# Altium PCB CAP-BULK.PcbDoc
Units mm, origin at the board's own origin, x right, y up, seen from the top; angles counter-clockwise.
Board outline 200 x 80 mm, 2 copper layers (Top Layer, Bottom Layer); 33 components, 19 nets, 78 pads, 172 vias.
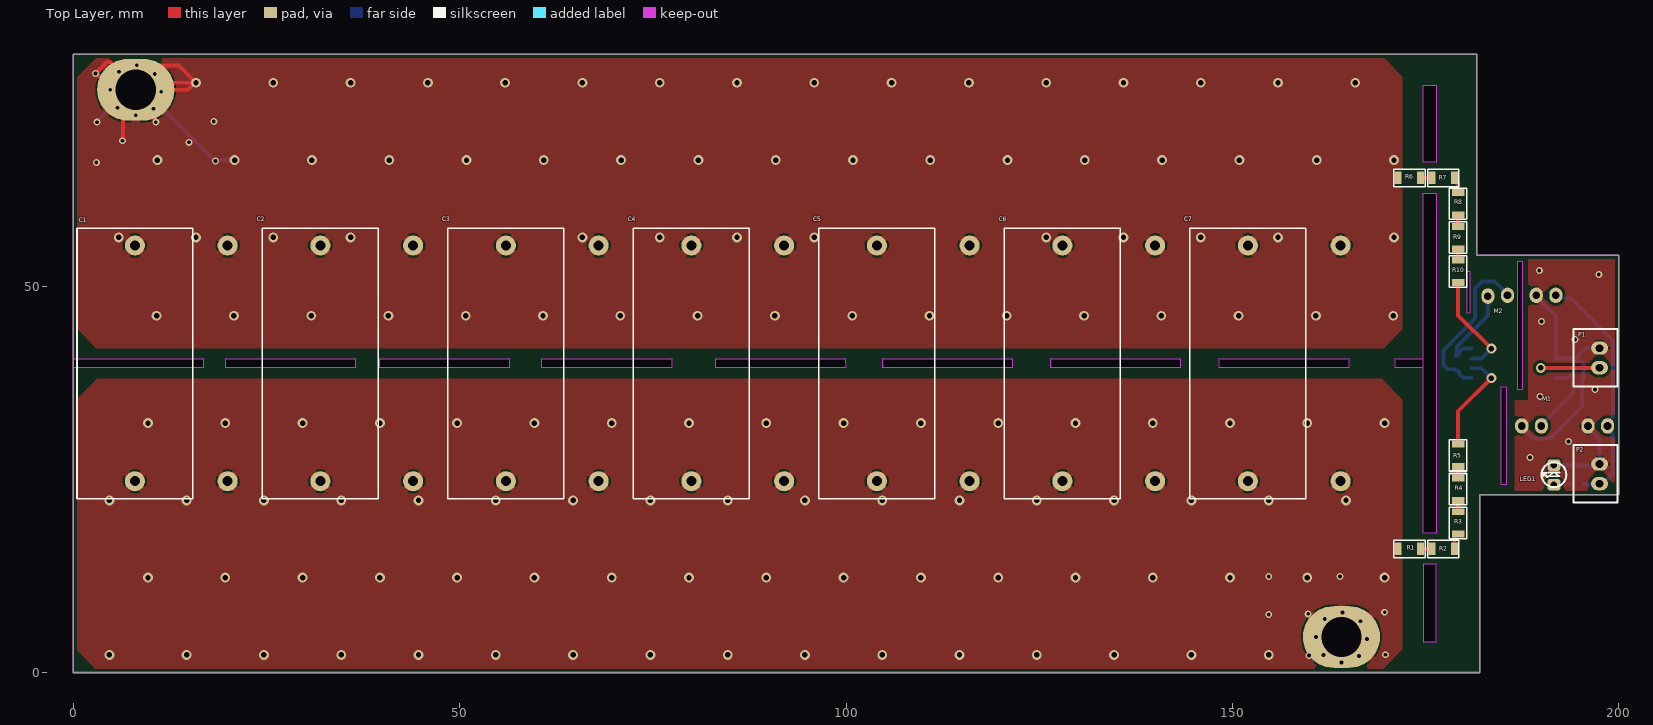
[diagram p0: Top Layer view]
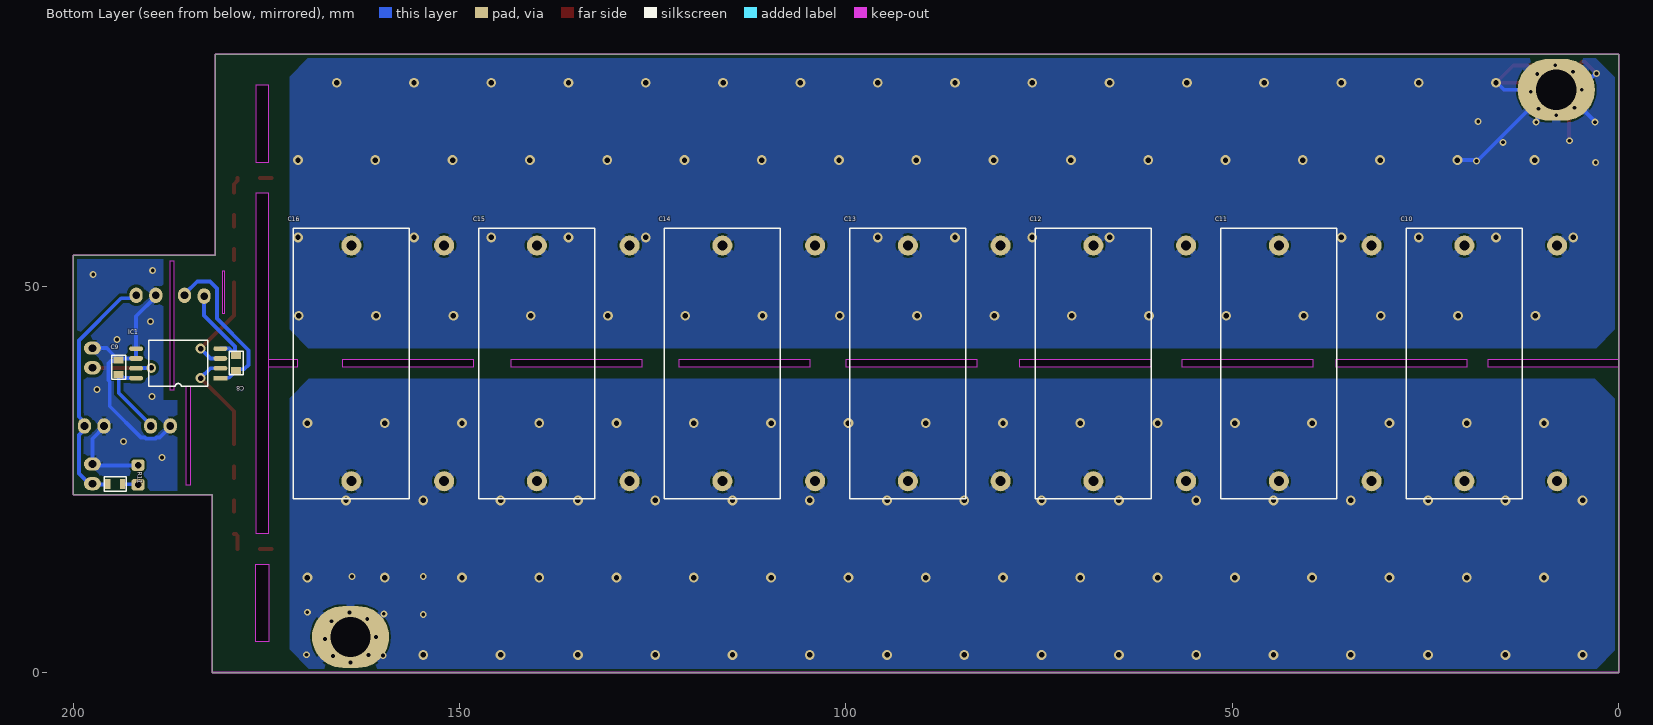
[diagram p1: Bottom Layer view, seen from below]
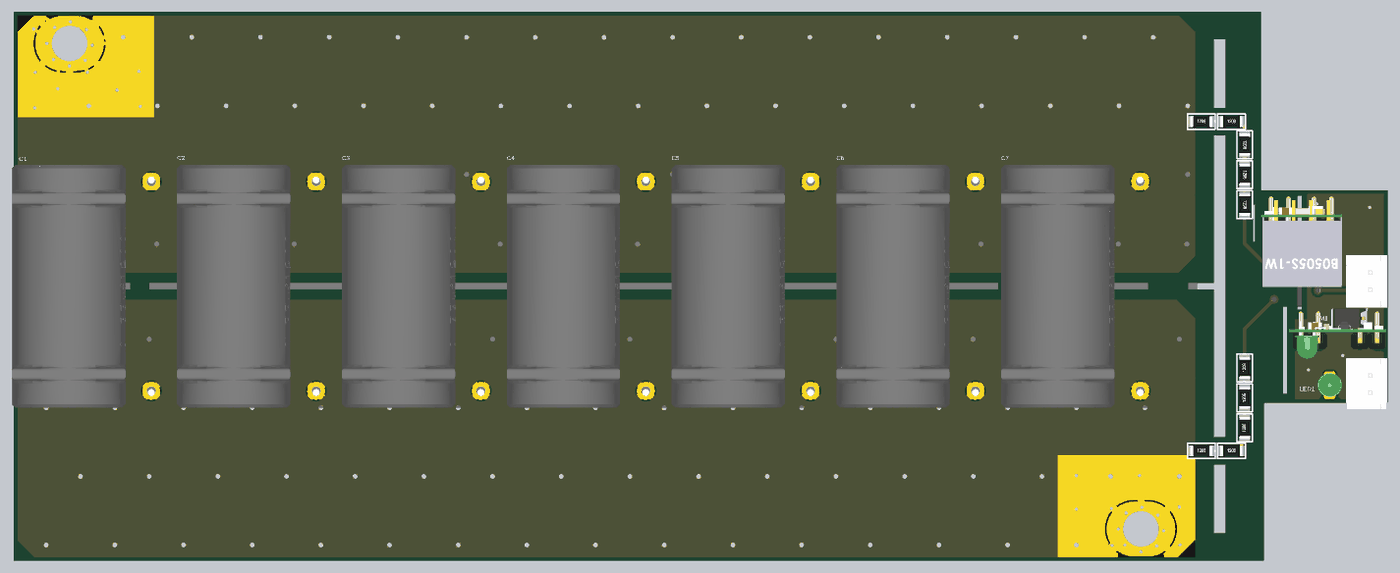
[diagram p2: 3D render of the assembled board from above, using the file's embedded part models]
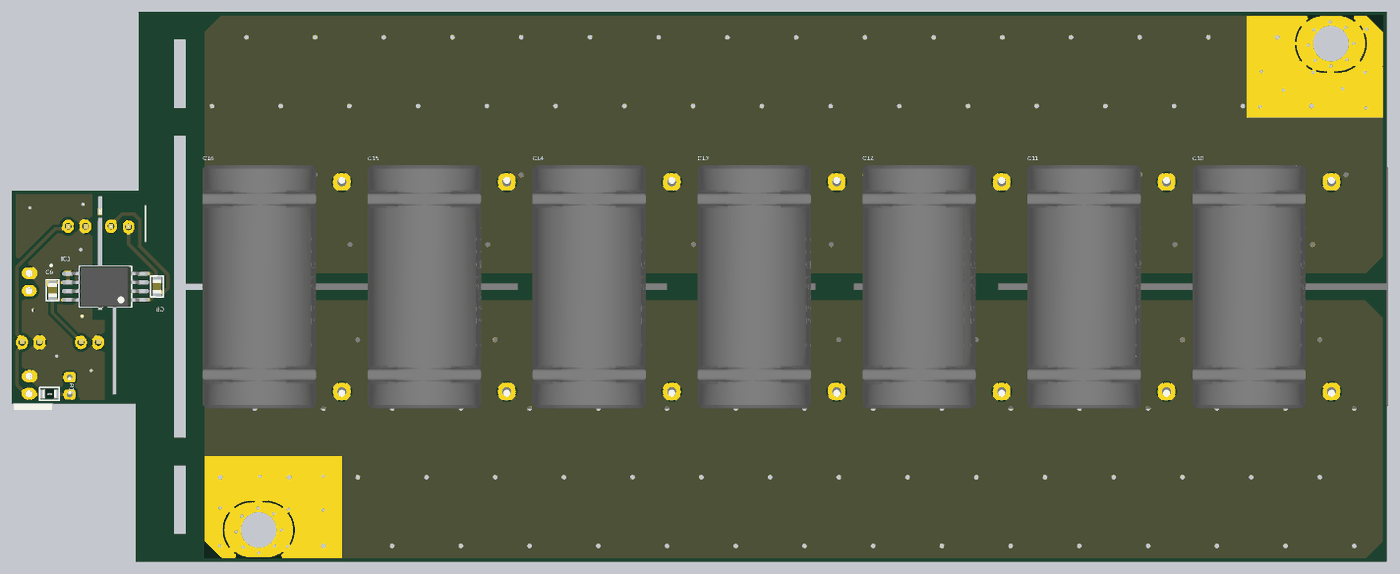
[diagram p3: 3D render of the assembled board from below, using the file's embedded part models]

## Layer stack, top to bottom
Top Solder: solder mask 0.0102, Solder Resist, Dk 3.5
Top Layer: signal copper 0.0356
Dielectric 1: dielectric 0.32, FR-4, Dk 4.8
Bottom Layer: signal copper 0.0356
Bottom Solder: solder mask 0.0102, Solder Resist, Dk 3.5

## Board outline
0,0 0,80 181.6,80 181.6,54 200,54 200,23 182,23 182,0
cut-out: 171,40.5 171,39.5 174.7,39.5 174.7,40.5
cut-out: 148.2,40.5 148.2,39.5 165.1,39.5 165.1,40.5
cut-out: 126.4,40.5 126.4,39.5 143.3,39.5 143.3,40.5
cut-out: 104.7,40.5 104.7,39.5 121.6,39.5 121.6,40.5
cut-out: 83.1,40.5 83.1,39.5 100,39.5 100,40.5
cut-out: 60.6,40.5 60.6,39.5 77.5,39.5 77.5,40.5
cut-out: 39.6,40.5 39.6,39.5 56.5,39.5 56.5,40.5
cut-out: 19.7,40.5 19.7,39.5 36.6,39.5 36.6,40.5
cut-out: 185.4,24.3 184.8,24.3 184.8,37 185.4,37
cut-out: 180.4,51.9 180.7,51.9 180.7,46.5 180.4,46.5
cut-out: 186.9,53.2 187.5,53.2 187.5,36.6 186.9,36.6
cut-out: 176.4,62 176.4,18 174.7,18 174.7,62
cut-out: 174.7,4 176.4,4 176.4,14 174.7,14
cut-out: 174.7,76 176.4,76 176.4,66 174.7,66
cut-out: 0,40.5 0,39.5 16.9,39.5 16.9,40.5

## Design rules (kind name [scope] priority, off if disabled: settings)
Clearance [All] p1: gap=0.4 ignorepadtopadclearanceinfootprint=FALSE
HoleSize [All] p1: absolutevalues=TRUE maxlimit=10 minlimit=0.025 maxpercent=80.000 minpercent=20.000
MinimumAnnularRing [All] p1: minimumring=0.2
PolygonConnect [All] p1: thpad.connectstyle=Relief thpad.reliefconductorwidth=1 thpad.reliefentries=4 thpad.polygonreliefangle="90 Angle" thpad.airgapwidth=0.254 thpad.conductorbypadedge=TRUE thpad.mindistance=0.381 thpad.enablemindistance=FALSE smdpad.connectstyle=Relief smdpad.reliefconductorwidth=1 smdpad.reliefentries=4 smdpad.polygonreliefangle="90 Angle" smdpad.airgapwidth=0.254 smdpad.conductorbypadedge=TRUE smdpad.mindistance=0.381 smdpad.enablemindistance=FALSE via.connectstyle=Direct via.reliefconductorwidth=1 via.reliefentries=4 via.polygonreliefangle="90 Angle" via.airgapwidth=0.254
RoutingVias [All] p1: holewidth=0.711 width=1.27 viastyle="Through Hole" minholewidth=0.3 minwidth=0.45 maxholewidth=0.711 maxwidth=1.27
SolderMaskExpansion [All] p1: expansion=0.102 istentingtop=FALSE
SupplyNets "Schematic Supply Nets_6" [InNet('V-')] p1: voltage=0.000
SupplyNets "Schematic Supply Nets_5" [InNet('+5Vpwr')] p2: voltage=0.000
SupplyNets "Schematic Supply Nets_4" [InNet('DIGITAL_GND')] p3: voltage=0.000
SupplyNets "Schematic Supply Nets_3" [InNet('+5Vdigital')] p4: voltage=0.000
SupplyNets "Schematic Supply Nets_2" [InNet('GND')] p5: voltage=0.000
SupplyNets "Schematic Supply Nets_1" [InNet('V+')] p6: voltage=0.000
SupplyNets "Schematic Supply Nets" [InNet('+3V3digital')] p7: voltage=0.000
UnRoutedNet [All] p1: checkbadconnections=TRUE
Width [All] p1: maxlimit=10 minlimit=0.5 preferedwidth=0.5 minimp=50.000000 maximp=50.000000 favimp=50.000000
28 further rules are at their usual default settings.

## Components (designator, comment, footprint, x,y, rotation, side; value= is the part's Value field where it differs from the comment)
C1 "0.33uF/630V" 0.33UF/630V 8,40 r90 top
C2 "0.33uF/630V" 0.33UF/630V 32,40 r90 top
C3 "0.33uF/630V" 0.33UF/630V 56,40 r90 top
C4 "0.33uF/630V" 0.33UF/630V 80,40 r90 top
C5 "0.33uF/630V" 0.33UF/630V 104,40 r90 top
C6 "0.33uF/630V" 0.33UF/630V 128,40 r90 top
C7 "0.33uF/630V" 0.33UF/630V 152,40 r90 top
C8 "100nF/50V/0805" "CAP 0805" 178.9,40.05 r90 bottom
C9 "100nF/50V/0805" "CAP 0805" 194.1,39.5 r90 bottom
C10 "0.33uF/630V" 0.33UF/630V 20,40 r90 bottom
C11 "0.33uF/630V" 0.33UF/630V 44,40 r90 bottom
C12 "0.33uF/630V" 0.33UF/630V 68,40 r90 bottom
C13 "0.33uF/630V" 0.33UF/630V 92,40 r90 bottom
C14 "0.33uF/630V" 0.33UF/630V 116,40 r90 bottom
C15 "0.33uF/630V" 0.33UF/630V 140,40 r90 bottom
C16 "0.33uF/630V" 0.33UF/630V 164,40 r90 bottom
IC1 "AMC1200BDWVR" SOIC8-AMC1200 186.4,40 r0 bottom
LED1 "LED 3mm/Green" "LED 3mm" 191.625,25.57 r90 top
M1 "5Vto3V3" 5Vto3V3 198.54,31.9 r180 top
M2 "DCtoDCidolate" dctodc 187.445,48.75 r180 top
P1 "XH2PIN" XH-2Pin 197.5,40.7 r270 top
P2 "XH2PIN" XH-2Pin 197.5,25.7 r270 top
R1 "1M/1206" "RES 1206" 172.9,16 r0 top
R2 "1M/1206" "RES 1206" 177.275,16 r0 top
R3 "1M/1206" "RES 1206" 179.2,19.35 r90 top
R4 "1M/1206" "RES 1206" 179.2,23.725 r90 top
R5 "1M/1206" "RES 1206" 179.2,28.1 r90 top
R6 "1M/1206" "RES 1206" 172.9,64 r0 top
R7 "1M/1206" "RES 1206" 177.275,64 r0 top
R8 "1M/1206" "RES 1206" 179.2,60.65 r270 top
R9 "1M/1206" "RES 1206" 179.2,56.275 r270 top
R10 "1M/1206" "RES 1206" 179.2,51.9 r270 top
R11 "560R/0805" "RES 0805" 194.55,24.4 r0 bottom

## Footprints (in the part's own frame and the unit in brackets; to place one, negate y for a bottom-side part, rotate by r counter-clockwise, add the part's x,y. Pads: shape width x height; smd on the part's side, far side on the other; paste and mask are expansions set on the pad)
0.33UF/630V [mm]
  round 2.6 hole 1.3: 1(-15.25,0) 2(15.25,0)
  silkscreen extent -17.5,-7.5 17.5,7.5, body extent -17.7,-8.25 17.7,8.25, height 25
5Vto3V3 [mm]
  oval 1.7x2 hole 1: 1(0,0) 2(2.54,0) 3(8.57,0) 4(11.11,0)
  body extent -1.3,-4.81 12.9,2.5, height 18
"CAP 0805" [mm]
  rect 0.9x1.3 smd: 1(-0.95,0) 2(0.95,0)
  silkscreen extent -1.54,-0.92 1.54,0.92, body extent -1,-0.63 1,0.63, height 1
dctodc [mm]
  oval 1.7x2 hole 1: 1(-4.395,-0.05) 2(-1.855,-0.05) 3(1.855,-0.05) 4(4.395,0.05)
  body extent -5.94,-4.31 5.87,8.85, height 15.5
"LED 3mm" [mm]
  rrect50% 1.5x1.7 hole 0.85 mask+0.1: 1(-1.27,0.025) 2(1.27,0.025)
  silkscreen extent -1.57,-1.57 1.62,1.63, body extent -1.72,-1.73 1.78,1.77, height 3.9
"RES 0805" [mm]
  rect 0.7x1.3 smd mask+0.051: 1(-0.95,0) 2(0.95,0)
  silkscreen extent -1.43,-0.95 1.43,0.95, body extent -1,-0.63 1,0.63, height 0.5
"RES 1206" [mm]
  rect 0.9x1.6 smd: 1(-1.45,0) 2(1.45,0)
  silkscreen extent -2.02,-1.12 2.03,1.12, body extent -1.6,-0.8 1.6,0.8, height 0.6
SOIC8-AMC1200 [mm]
  rect 1.8x0.6 smd: 1(-5.45,1.905)
  oval 1.8x0.6 smd: 2(-5.45,0.635) 3(-5.45,-0.635) 4(-5.45,-1.905) 5(5.45,-1.905) 6(5.45,-0.635) 7(5.45,0.635) 8(5.45,1.905)
  silkscreen extent -3.8,-2.98 3.8,2.98, body extent -5.75,-2.95 5.75,2.95, height 2.8
XH-2Pin [mm]
  oval 1.7x2.2 hole 1 mask+0.1: 1(1.27,0) 2(-1.27,0)
  silkscreen extent -3.73,-3.4 3.67,2.35, body extent -3.73,-3.4 3.67,2.35, height 7

## Part data
C1 C2 C3 C4 C5 C6 C7 C8 C9 C10 C11 C12 C13 C14 C15 C16: library part Capacitor, "Capacitor"
IC1: "isolate op-amp g = 8"
LED1: library part LED, "Typical LED", COLOR=Green
P1 P2: library part "Header 2H", "RELAY", LatestRevisionDate=17-Jul-2002, LatestRevisionNote="Re-released for DXP Platform.", Publisher="Altium Limited"
R1 R2 R3 R4 R5 R6 R7 R8 R9 R10 R11: library part Res

## Free pads (board coordinates)
  oval 10x8 hole 5.2: 0(8.1,75.4) 0(164.1,4.6)

## Via types
v1: diameter 1.27, hole 0.7, Top Layer to Bottom Layer, tented both sides, 130 vias
v2: diameter 0.9, hole 0.5, Top Layer to Bottom Layer, tented both sides, 39 vias
v3: diameter 1.27, hole 0.711, Top Layer to Bottom Layer, tented both sides, 3 vias

## Nets (pads, with @x,y where several pads share a name; then routed paths per layer and width w, separated by ;. In a path a pad name is that pad's centre, name@x,y a point inside that pad or via, vN(x,y) a via of type N, cw(c..) or ccw(c..) an arc to the next point about the centre after c; other vN are vias at no path point)
+3V3digital: C9.1 IC1.8 M1.3 | length 10.8
  Bottom Layer w0.5: M1.3 189.97,32.05 194.1,36.18 C9.1 193.9,38.55 193.445,38.095 IC1.8
+5Vdigital: M1.1 M2.1 P2.1 R11.2 | length 31.6
  Bottom Layer w0.5: M2.1 192.22,48.42 193.78,48.42 199.25,42.95 199.25,33.085 M1.1@198.54,32.375 ; R11.2 195.585,24.315 197.415,24.315 197.5,24.23 197.75,24.23 199.25,25.73 199.25,30.715 198.54,31.425 M1.1
+5Vpwr: C8.1 IC1.1 M2.3 | length 21.3
  Bottom Layer w0.5: C8.1 178.77,39.23 177.87,39.23 177.3,39.8 177.3,41.7 181.4,45.8 181.4,49.7 182.3,50.6 183.94,50.6 185.59,48.95 M2.3 ; C8.1@179.1,39.1 179.3,38.9 179.3,38.7 179.855,38.145 180.9,38.145 IC1.1
DIGITAL_GND: C9.2 IC1.5 IC1.6 LED1.2 M1.2 M1.4 M2.2 P1.2 P2.2 | length 44.6
  Bottom Layer w0.5: M1.4 187.43,31.75 188.784,30.396 189.203,30.396 189.349,30.25 190.591,30.25 190.737,30.396 191.196,30.396 195.254,34.454 195.254,37.685 195.4,37.831 195.4,40.004 195.107,40.296 194.254,40.296 193.915,40.635 IC1.6 IC1.5 191.85,46.1 189.3,48.65 M2.2 ; LED1.2 191.635,26.805 197.465,26.805 197.5,26.77 197.5,30.25 196,31.75 M1.2 ; C9.2@194.3,40.45 194.8,40.95 194.8,41.12 195.65,41.97 P1.2
  other v2: 188.5,27.8 193.5,29.9 189.8,35.7 196.9,36.6 194.3,43.1 190,45.4 197.4,51.5 189.7,52
GND: C8.2 IC1.4 M2.4 | length 11.7
  Bottom Layer w0.5: C8.2 179.073,41.173 179.073,42.2 183.05,46.177 M2.4 ; C8.2@179.119,41.019 179.3,41.2 179.3,41.403 179.802,41.905 IC1.4
NetIC1_2: IC1.2 R5.2 | length 13.4
  Top Layer w0.5: R5.2 179.2,33.8 v3@183.5,38.1
  Bottom Layer w0.5: IC1.2 182.23,39.365 v3(183.5,38.095)
NetIC1_3: IC1.3 R10.2 | length 13.4
  Top Layer w0.5: R10.2 179.2,46.205 v3(183.5,41.905)
  Bottom Layer w0.5: IC1.3 182.23,40.635 v3(183.5,41.905)
NetIC1_7: IC1.7 P1.1 | length 9.6
  Top Layer w0.5: v3(189.9,39.4) 189.915,39.415 197.485,39.415 P1.1
  Bottom Layer w0.5: v3(189.9,39.4) 189.918,39.382 191.832,39.382 IC1.7
NetLED1_1: LED1.1 R11.1 | length 2
  Bottom Layer w0.5: LED1.1 191.65,24.35 193.55,24.35 R11.1
NetR1_2: R1.2 R2.1 | length 1.5
  Top Layer w0.5: R1.2 R2.1
NetR2_2: R2.2 R3.1 | length 2.3
  Top Layer w0.5: R2.2 178.725,17.7 178.925,17.9 R3.1
NetR3_2: R3.2 R4.1 | length 1.5
  Top Layer w0.5: R3.2 R4.1
NetR4_2: R4.2 R5.1 | length 1.5
  Top Layer w0.5: R4.2 R5.1
NetR6_2: R6.2 R7.1 | length 1.5
  Top Layer w0.5: R6.2 R7.1
NetR7_2: R7.2 R8.1 | length 2.1
  Top Layer w0.5: R7.2 178.725,63.65 179.2,63.175 R8.1
NetR8_2: R8.2 R9.1 | length 1.5
  Top Layer w0.5: R9.1 R8.2
NetR9_2: R9.2 R10.1 | length 1.5
  Top Layer w0.5: R10.1 R9.2
V+: C1.1 C2.1 C3.1 C4.1 C5.1 C6.1 C7.1 C10.1 C11.1 C12.1 C13.1 C14.1 C15.1 C16.1 pad.0@164.1,4.6 R1.1 | length 15.9
  Bottom Layer w0.5: v2(161.946,6.933) 161.946,6.754 pad.0@164.1,4.6 ; v2(164.1,1.3) 163.133,2.267 v2(161.767,2.267) pad.0@164.1,4.6 ; v2(164.227,7.773) 164.227,4.727 pad.0@164.1,4.6 ; v2(166.381,2.14) 164.1,4.42 pad.0@164.1,4.6
  other v1: 4.689,2.276 14.689,2.276 24.689,2.276 34.689,2.276 44.689,2.276 54.689,2.276 64.689,2.276 74.689,2.276 84.689,2.276 94.689,2.276 104.689,2.276 114.689,2.276 124.689,2.276 134.689,2.276 144.689,2.276 154.689,2.276 9.689,12.276 19.689,12.276 29.689,12.276 39.689,12.276 49.689,12.276 59.689,12.276 69.689,12.276 79.689,12.276 89.689,12.276 99.689,12.276 109.689,12.276 119.689,12.276 129.689,12.276 139.689,12.276 149.689,12.276 159.689,12.276 169.689,12.276 4.689,22.276 14.689,22.276 24.689,22.276 34.689,22.276 44.689,22.276 54.689,22.276 64.689,22.276 74.689,22.276 84.689,22.276 94.689,22.276 104.689,22.276 114.689,22.276 124.689,22.276 134.689,22.276 144.689,22.276 154.689,22.276 164.689,22.276 9.689,32.276 19.689,32.276 29.689,32.276 39.689,32.276 49.689,32.276 59.689,32.276 69.689,32.276 79.689,32.276 89.689,32.276 99.689,32.276 109.689,32.276 119.689,32.276 129.689,32.276 139.689,32.276 149.689,32.276 159.689,32.276 169.689,32.276
  other v2: 159.9,2.2 169.8,2.3 167.4,4.346 160.8,4.6 166.56,6.627 154.7,7.5 159.8,7.6 169.7,7.8 154.7,12.4 163.9,12.4
V-: C1.2 C2.2 C3.2 C4.2 C5.2 C6.2 C7.2 C10.2 C11.2 C12.2 C13.2 C14.2 C15.2 C16.2 pad.0@8.1,75.4 R6.1 | length 73.1
  Top Layer w0.5: pad.0@4.954,75.554 3.008,77.5 v2(2.9,77.5) 4.376,78.976 4.795,78.976 8.1,75.671 pad.0@8.1,75.4 ; v2(6.4,68.8) 6.477,68.877 6.477,73.777 pad.0@8.1,75.4 ; v2(8.227,78.573) 8.273,78.527 13.673,78.527 v1(15.9,76.3) ; pad.0@10.535,72.965 10.535,71.473 10.7,71.308 v2(10.7,71.2) ; pad.0@11.4,75.4 14.841,75.4 15.741,76.3 v1(15.9,76.3) ; pad.0@8.1,75.4 9,76.3 v1(15.9,76.3)
  Bottom Layer w0.5: v2(2.9,77.5) 3.008,77.5 pad.0@4.954,75.554 ; v2(3.1,71.2) 3.1,71.3 pad.0@7.2,75.4 ; pad.0@8.1,75.4 9.1,75.4 18.2,66.3 v1(20.9,66.3) ; pad.0@10.535,72.965 10.535,71.473 10.7,71.308 v2(10.7,71.2) ; pad.0@11.4,75.4 14.841,75.4 15.741,76.3 v1(15.9,76.3)
  other v1: 10.8,46.15 20.8,46.15 30.8,46.15 40.8,46.15 50.8,46.15 60.8,46.15 70.8,46.15 80.8,46.15 90.8,46.15 100.8,46.15 110.8,46.15 120.8,46.15 130.8,46.15 140.8,46.15 150.8,46.15 160.8,46.15 170.8,46.15 5.9,56.3 15.9,56.3 25.9,56.3 35.9,56.3 65.9,56.3 75.9,56.3 85.9,56.3 95.9,56.3 125.9,56.3 135.9,56.3 145.9,56.3 155.9,56.3 170.9,56.3 10.9,66.3 30.9,66.3 40.9,66.3 50.9,66.3 60.9,66.3 70.9,66.3 80.9,66.3 90.9,66.3 100.9,66.3 110.9,66.3 120.9,66.3 130.9,66.3 140.9,66.3 150.9,66.3 160.9,66.3 170.9,66.3 25.9,76.3 35.9,76.3 45.9,76.3 55.9,76.3 65.9,76.3 75.9,76.3 85.9,76.3 95.9,76.3 105.9,76.3 115.9,76.3 125.9,76.3 135.9,76.3 145.9,76.3 155.9,76.3 165.9,76.3
  other v2: 3,66 18.4,66.2 15,68.6 18.2,71.3 8.1,72.1 10.381,72.94 5.767,73.067 11.4,75.146 4.8,75.4 10.56,77.427 5.946,77.733

## Polygon pours and split planes (outlines as drawn)
V- on Top Layer "V-_L01_P009" (solid, remove dead copper, pour order 9): 0.489,76.989 2.976,79.476 169.624,79.476 171.989,77.111 171.989,44.389 169.576,41.976 3.024,41.976 0.489,44.511
V+ on Top Layer "V+_L01_P007" (solid, remove dead copper, pour order 7): 172,3 169.5,0.5 2.9,0.5 0.5,2.9 0.5,35.4 3.1,38 169.3,38 172,35.3
DIGITAL_GND on Top Layer "DIGITAL_GND_L01_P004" (solid, remove dead copper, pour order 4): 200,23 186.5,23 186.5,35.2 188.3,35.2 188.3,54 200,54
V+ on Bottom Layer "V+_L02_P006" (solid, remove dead copper, pour order 6): 172,3 169.5,0.5 2.9,0.5 0.5,2.9 0.5,35.4 3.1,38 169.5,38 172,35.5
V- on Bottom Layer "V-_L02_P008" (solid, remove dead copper, pour order 8): 0.489,76.989 2.976,79.476 169.624,79.476 171.989,77.111 171.989,44.389 169.576,41.976 2.924,41.976 0.489,44.411
DIGITAL_GND on Bottom Layer "DIGITAL_GND_L02_P005" (solid, remove dead copper, pour order 5): 200.03,23 186.53,23 186.53,35.2 188.33,35.2 188.33,54 200.03,54

## Keep-outs
Keep-Out Layer:
  the board outline again, w0.2

## Silkscreen, mask and mechanical layers (free items; w line width, h text height)
Top Solder:
  rectangle: 152,0.5 172,15.361
  rectangle: 0.5,64.639 20.361,79.5
Bottom Solder:
  rectangle: 152,0.5 172,15.361
  rectangle: 0.5,64.639 20.361,79.5